# Altium PCB ATSAM4C-CB.PcbDoc (part 2 of 2)
Units mil, origin at the board's own origin, x right, y up, seen from the top; angles counter-clockwise.
Board outline 3937.01 x 5511.81 mil, 2 copper layers (Top Layer, Bottom Layer); 213 components, 172 nets, 705 pads, 473 vias.
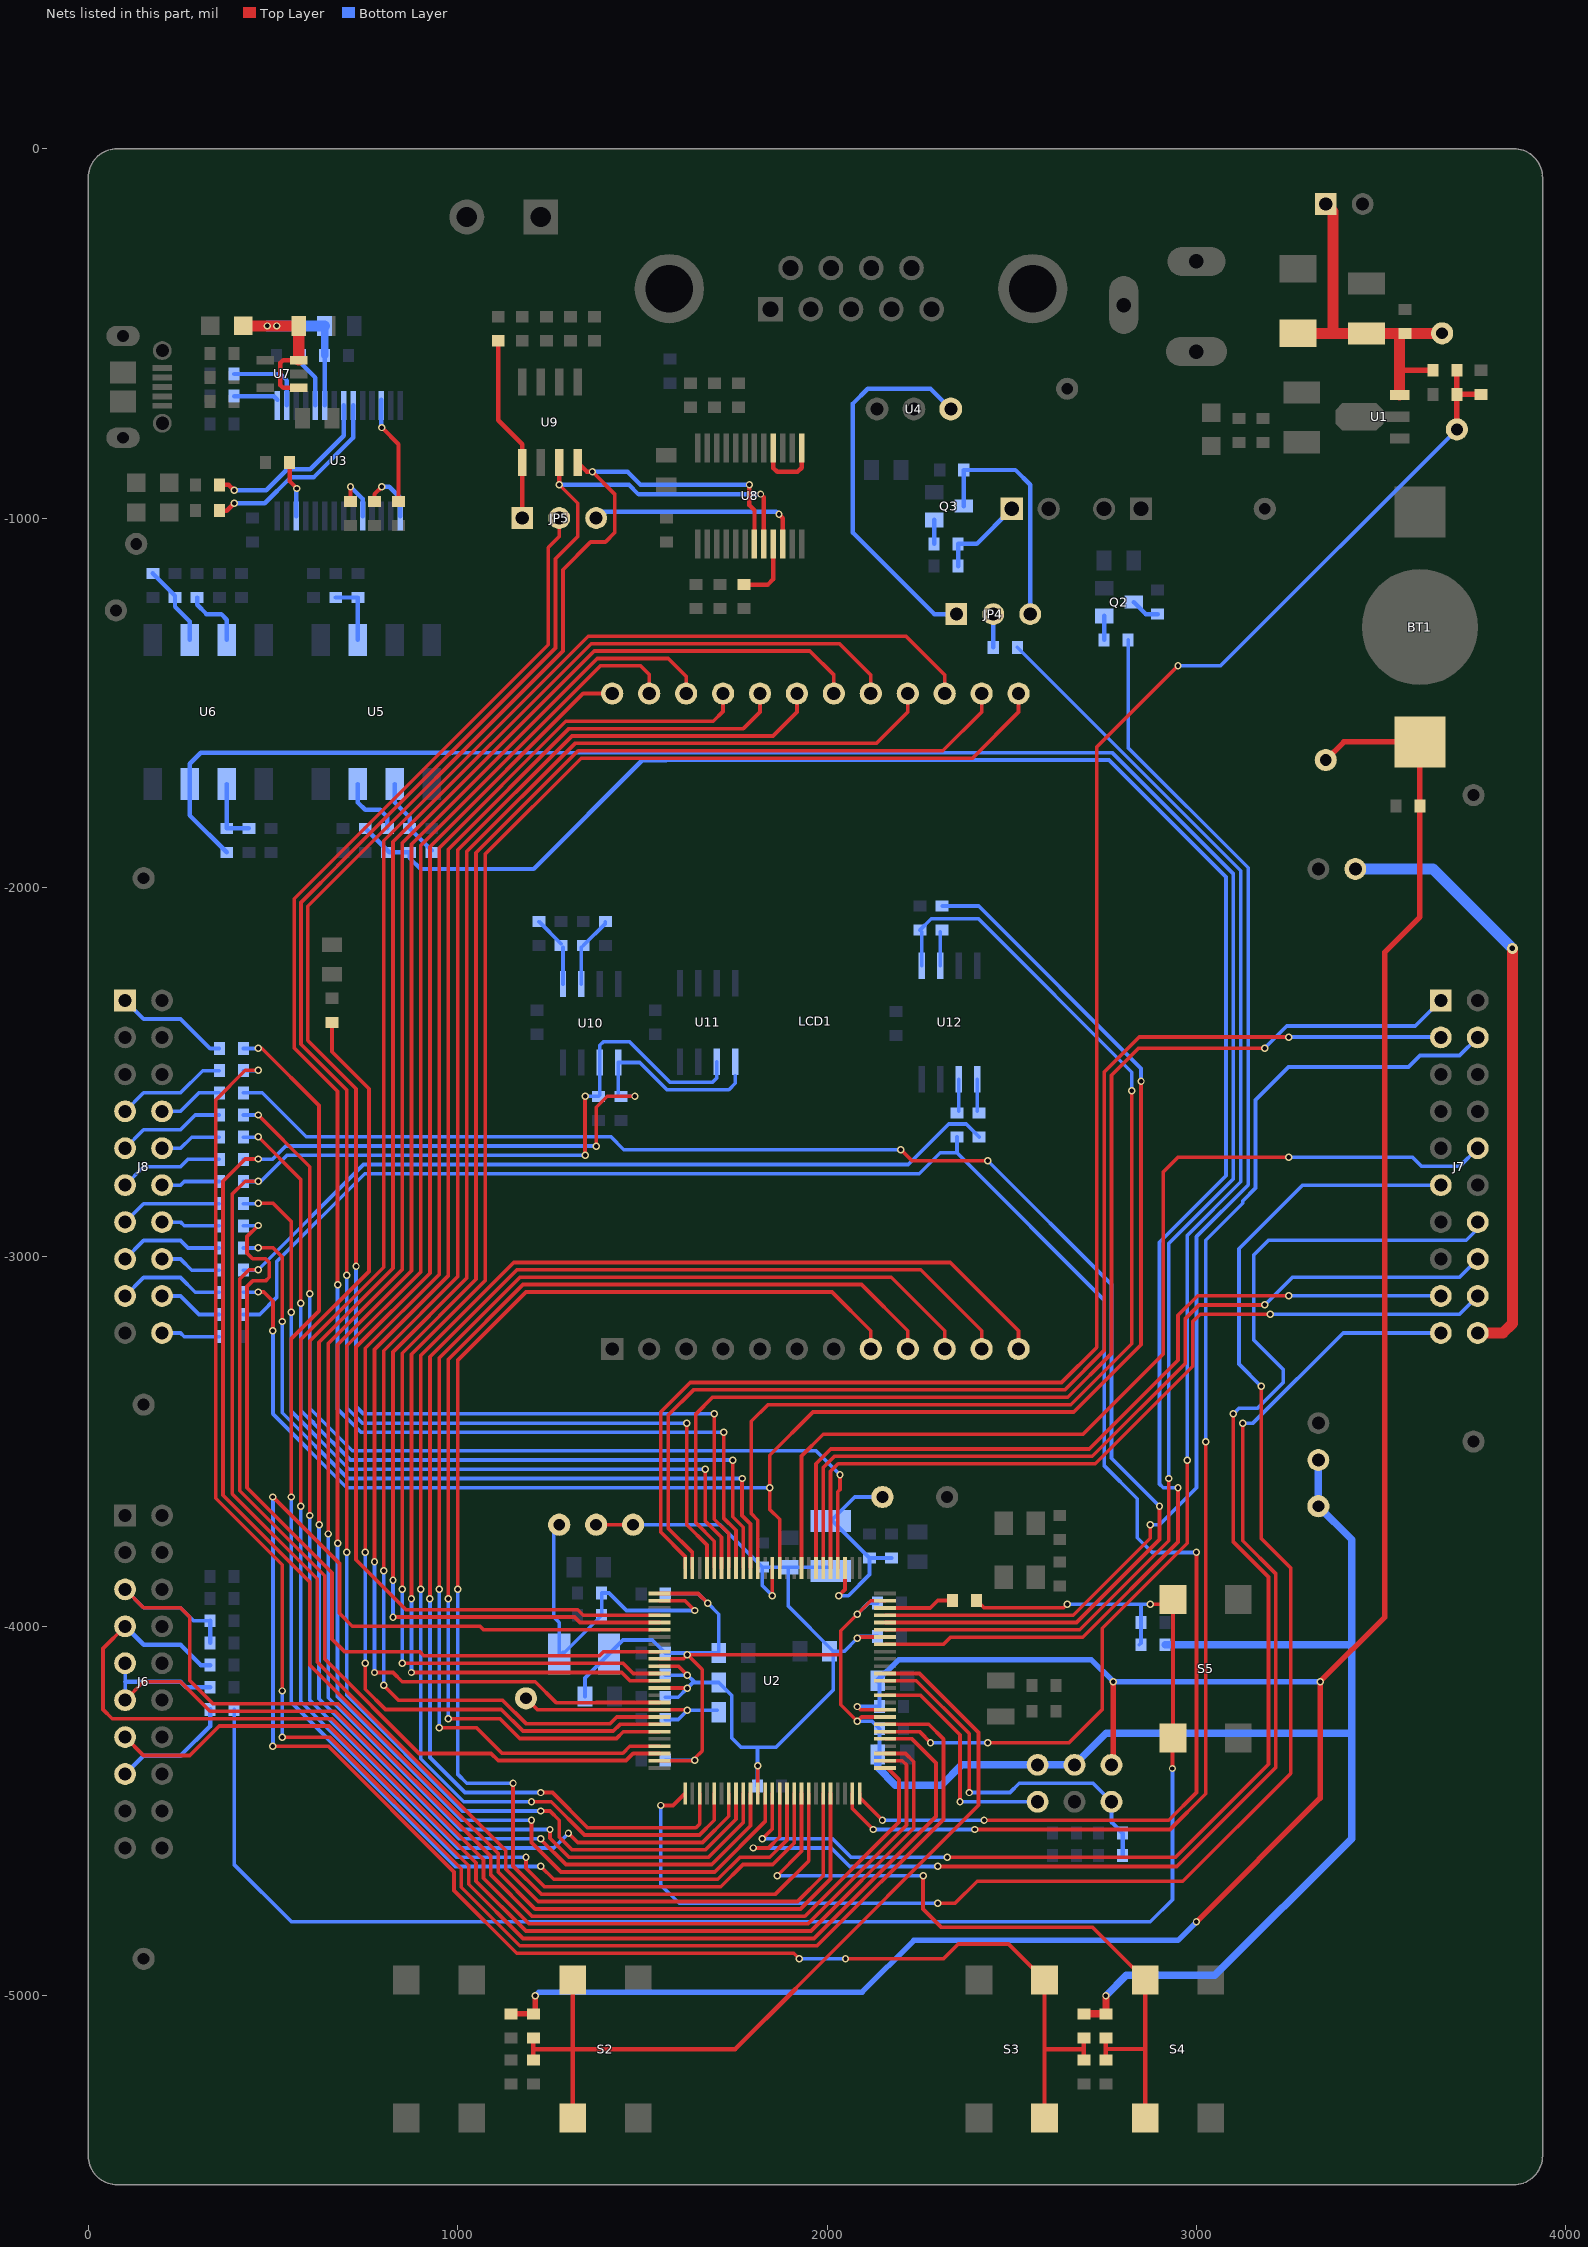
[diagram p2: the nets of this part, all layers, seen from the top]

## Via types
v1: diameter 20, hole 12, Top Layer to Bottom Layer, 470 vias
v2: diameter 30, hole 15, Top Layer to Bottom Layer, 3 vias

## Nets (pads, with @x,y where several pads share a name; then routed paths per layer and width w, separated by ;. In a path a pad name is that pad's centre, name@x,y a point inside that pad or via, vN(x,y) a via of type N, cw(c..) or ccw(c..) an arc to the next point about the centre after c; other vN are vias at no path point) (continued)
NetJ6_15: J6.15 R79.1 | length 328.8
  Bottom Layer w12: J6.15@100,-4400 150,-4350 250,-4350 330,-4270 R79.1@330,-4225
NetJ8_1: J8.1 R62.2 | length 308.8
  Bottom Layer w10: J8.1@100,-2305.91 150,-2355.91 250,-2355.91 330,-2435.91 R62.2@355,-2435.91
NetJ8_7: J8.7 R63.2 | length 300.6
  Bottom Layer w10: J8.7@100,-2605.91 150,-2555.91 250,-2555.91 310,-2495.91 R63.2@355,-2495.91
NetJ8_8: J8.8 R64.1 | length 175.7
  Bottom Layer w10: J8.8@200,-2605.91 250,-2605.91 300,-2555.91 R64.1@355,-2555.91
NetJ8_9: J8.9 R65.2 | length 292.3
  Bottom Layer w10: J8.9@100,-2705.91 150,-2655.91 250,-2655.91 290,-2615.91 R65.2@355,-2615.91
NetJ8_10: J8.10 R66.1 | length 167.4
  Bottom Layer w10: J8.10@200,-2705.91 250,-2705.91 280,-2675.91 R66.1@355,-2675.91
NetJ8_11: J8.11 R67.2 | length 284
  Bottom Layer w10: J8.11@100,-2805.91 150,-2755.91 250,-2755.91 270,-2735.91 R67.2@355,-2735.91
NetJ8_12: J8.12 R68.1 | length 159.1
  Bottom Layer w10: J8.12@200,-2805.91 250,-2805.91 260,-2795.91 R68.1@355,-2795.91
NetJ8_13: J8.13 R69.2 | length 275.7
  Bottom Layer w10: J8.13@100,-2905.91 150,-2855.91 R69.2@355,-2855.91
NetJ8_14: J8.14 R70.1 | length 159.1
  Bottom Layer w10: J8.14@200,-2905.91 250,-2905.91 260,-2915.91 R70.1@355,-2915.91
NetJ8_15: J8.15 R71.2 | length 284
  Bottom Layer w10: J8.15@100,-3005.91 150,-2955.91 250,-2955.91 270,-2975.91 R71.2@355,-2975.91
NetJ8_16: J8.16 R72.1 | length 167.4
  Bottom Layer w10: J8.16@200,-3005.91 250,-3005.91 280,-3035.91 R72.1@355,-3035.91
NetJ8_17: J8.17 R73.2 | length 292.3
  Bottom Layer w10: J8.17@100,-3105.91 150,-3055.91 250,-3055.91 290,-3095.91 R73.2@355,-3095.91
NetJ8_18: J8.18 R74.1 | length 175.7
  Bottom Layer w10: J8.18@200,-3105.91 250,-3105.91 300,-3155.91 R74.1@355,-3155.91
NetJ8_20: J8.20 R75.1 | length 159.1
  Bottom Layer w10: J8.20@200,-3205.91 250,-3205.91 260,-3215.91 R75.1@355,-3215.91
NetJP1_2: JP1.2 U2.36 | length 638.3
  Top Layer w10: U2.36@2157.33,-4186.61 2252.83,-4186.61 2360,-4293.78 v1(2360,-4475)
  Bottom Layer w10: v1(2360,-4475) JP1.2@2570,-4475
NetJP4_1: JP4.1 U4.1 | length 1025.5
  Bottom Layer w12: U4.1@2335,-705 2280,-650 2110,-650 2070,-690 2070,-1040 2290,-1260 JP4.1@2350,-1260
NetJP4_2: JP4.2 R19.2 | length 90
  Bottom Layer w12: R19.2@2450,-1350 JP4.2@2450,-1260
NetJP4_3: JP4.3 Q3.3 R16.1 | length 644.1
  Bottom Layer w12: Q3.3@2370,-967.5 R16.1@2370,-870 2510,-870 2550,-910 JP4.3@2550,-1260
NetQ1_1: Q1.1 R20.2 R23.2 | length 244.4
  Bottom Layer w12: R23.2@2355,-1130 R20.2@2355,-1070 2405,-1070 Q1.1@2500,-975
NetQ2_1: Q2.1 R18.2 | length 65
  Bottom Layer w12: R18.2@2750,-1330 Q2.1@2750,-1265
NetQ2_3: Q2.3 R25.2 | length 78.5
  Bottom Layer w12: Q2.3@2830,-1227.5 2862.5,-1260 R25.2@2895,-1260
NetQ3_1: Q3.1 R20.1 | length 65
  Bottom Layer w12: R20.1@2290,-1070 Q3.1@2290,-1005
NetR3_1: R3.1 U2.48 | length 191.1
  Top Layer w10: U2.48@2157.32,-3950.39 2279.61,-3950.39 2300,-3930 R3.1@2340,-3930
NetR13_1: R13.1 U3.1 | length 160.7
  Top Layer w12: R13.1@775,-955 775,-935 v1(795,-915)
  Bottom Layer w12: v1(795,-915) 815,-915 845,-945 U3.1@845,-995
NetR14_1: R14.1 U3.5 | length 133.5
  Top Layer w12: R14.1@710,-955 v1(710,-915)
  Bottom Layer w12: v1(710,-915) 742.64,-947.64 U3.5@742.64,-995
NetR15_2: R15.2 U3.16 | length 217.4
  Bottom Layer w12: R15.2@395,-610 520,-610 537.91,-627.91 U3.16@537.91,-695
NetR17_2: R17.2 U3.15 | length 121.5
  Bottom Layer w12: R17.2@395,-670 502.28,-670 U3.15@512.32,-680.04
NetR21_1: R21.1 U3.23 | length 531.6
  Top Layer w12: R21.1@355,-980 375,-980 v1(395,-960)
  Bottom Layer w12: v1(395,-960) 477.85,-960 547.85,-890 610,-890 717.05,-782.95 U3.23@717.05,-695
NetR22_2: R22.2 U3.19 | length 151.4
  Bottom Layer w12: R22.2@575,-560 575,-580 614.68,-619.69 U3.19@614.68,-695
NetR26_1: R26.1 U3.22 | length 486.2
  Top Layer w12: R26.1@355,-910 380,-910 v1(395,-925)
  Bottom Layer w12: v1(395,-925) 481.73,-925 538.73,-868 600.89,-868 691.46,-777.43 U3.22@691.46,-695
NetR27_1: R27.1 U3.12 | length 153.9
  Top Layer w12: R27.1@545,-850 545,-900 v1(565,-920)
  Bottom Layer w12: U3.12@563.5,-995 563.5,-921.5 v1(565,-920)
NetR28_1: R28.1 U3.26 | length 294.1
  Top Layer w12: v1(795,-755) 840,-800 R28.1@840,-955
  Bottom Layer w12: U3.26@793.82,-680.04 793.82,-753.82 v1(795,-755)
NetR29_1: R29.1 R35.2 U5.2 | length 175
  Bottom Layer w12: R29.1@670,-1215 R35.2@730,-1215 U5.2@730,-1330
NetR31_1: R31.1 R36.2 U6.2 | length 180
  Bottom Layer w12: U6.2@375,-1720 R36.2@375,-1840 R31.1@435,-1840
NetR33_2: R33.2 U5.7 | length 176.6
  Bottom Layer w12: U5.7@730,-1720 730,-1770 750,-1790 790,-1790 810,-1810 R33.2@810,-1840
NetR34_2: R34.2 U6.7 | length 171.6
  Bottom Layer w12: R34.2@295,-1215 295,-1235 320,-1260 360,-1260 375,-1275 U6.7@375,-1330
NetR37_2: R37.2 R39.2 U5.6 | length 221.4
  Bottom Layer w12: U5.6@830,-1720 830,-1770 870,-1810 R37.2@870,-1840 R39.2@930,-1900
NetR38_2: R38.2 R40.2 U6.6 | length 216.4
  Bottom Layer w12: R40.2@175,-1150 R38.2@235,-1210 ; R38.2@235,-1215 235,-1240 275,-1280 U6.6@275,-1330
NetR45_1: R45.1 U8.9 | length 176.1
  Top Layer w12: R45.1@1780,-1180 1840,-1180 1854.72,-1165.28 U8.9@1854.72,-1070
NetR48_1: R48.1 R50.2 U10.1 | length 183.6
  Bottom Layer w10: R50.2@1220,-2092.44 R48.1@1280,-2152.44 ; U10.1@1285,-2261.14 R48.1@1285,-2162.44
NetR49_1: R49.1 R51.2 U10.2 | length 188.6
  Bottom Layer w10: U10.2@1335,-2261.14 R49.1@1335,-2162.44 ; R49.1@1340,-2157.44 1400,-2097.44 R51.2@1400,-2092.44
NetR55_2: R55.2 U12.5 | length 86.5
  Bottom Layer w10: R55.2@2406.69,-2605.43 U12.5@2406.69,-2518.97
NetR56_2: R56.2 U12.2 | length 91.5
  Bottom Layer w10: U12.2@2306.69,-2211.89 R56.2@2306.69,-2120.43
NetR57_2: R57.2 U12.6 | length 86.5
  Bottom Layer w10: R57.2@2356.69,-2605.43 U12.6@2356.69,-2518.97
NetU8_13: U8.13 U8.16 | length 193.7
  Top Layer w12: U8.16@1854.72,-810.16 1854.72,-864.72 1865,-875 1920,-875 1931.5,-863.5 U8.13@1931.5,-810.16
NRST: C69.2 R3.2 R78.1 R79.2 S5.2 | length 4503.6
  Top Layer w10: R3.2@2405,-3930 2425,-3950 2640,-3950 v1(2650,-3940) ; v1(2875,-3940) S5.2@2924.41,-3940 ; v1(2935,-4385) S5.2@2935,-4303.43 ; S5.2@2936.42,-4302.01 S5.2@2936.42,-3927.99
  Bottom Layer w10: R79.2@395,-4225 395,-4645 550,-4800 2875,-4800 2935,-4740 v1(2935,-4385) ; v1(2650,-3940) 2850,-3940 ; R78.1@2845,-4050 2850,-4045 C69.2@2850,-3990 2850,-3940 ; v1(2875,-3940) 2850,-3940
PA6: R56.1 R73.1 U2.62 | length 4735.8
  Top Layer w10: v1(460,-3095) 475,-3095 500,-3120 v1(500,-3200) ; U2.62@1871.7,-3841.92 1871.7,-3710.32 1845,-3683.62 v1(1845,-3625) 1845,-3536.72 1961.72,-3420 2668.14,-3420 2850,-3238.14 v1(2850,-2525)
  Bottom Layer w10: R73.1@420,-3095.91 v1@459.09,-3095.91 ; v1(500,-3200) 500,-3425 700,-3625 v1(1845,-3625) ; R56.1@2311.69,-2050.43 2410.43,-2050.43 2850,-2490 v1(2850,-2525)
PA7: R55.1 R72.2 U2.98 | length 4381.3
  Top Layer w10: v1(460,-3035) 435,-3035 410,-3060 410,-3633.28 640,-3863.28 640,-4088.49 895.6,-4344.1 1090.63,-4344.1 1110,-4363.47 1455.95,-4363.47 1475,-4344.41 ; 1475,-4344.1 U2.98@1546.69,-4344.1
  Bottom Layer w10: R72.2@420,-3035.91 v1@459.09,-3035.91 ; v1(460,-3035) 745,-2750 2220,-2750 2329.57,-2640.43 2376.69,-2640.43 R55.1@2411.69,-2675.43
PA8: R57.1 R74.2 U2.25 | length 5262.1
  Top Layer w10: U2.25@2088.23,-4452.56 2088.23,-4463.23 v1(2150,-4525) ; v1(2425,-4525) 2925,-4525 3000,-4450 v1(3000,-3800)
  Bottom Layer w10: R74.2@420,-3155.91 464.09,-3155.91 510,-3110 510,-3013.28 748.28,-2775 2249.64,-2775 2306.34,-2718.31 2351.69,-2718.31 ; v1(2150,-4525) v1(2425,-4525) ; R57.1@2351.69,-2675.43 2351.69,-2718.31 ; v1(3000,-3800) 2880,-3800 2840,-3760 2840,-3655 2750,-3565 2750,-3116.61 2351.69,-2718.31
PA9: JP5.2 U2.68 | length 4209.1
  Top Layer w10: v1(675,-3075) 675,-2551.57 558,-2434.57 558,-2030.28 1245,-1343.28 1245,-1080 1275,-1050 JP5.2@1275,-1000 ; v1(1720,-3475) 1720,-3706.72 1753.58,-3740.29 U2.68@1753.58,-3841.93
  Bottom Layer w10: v1(675,-3075) 675,-3411.57 738.43,-3475 v1(1720,-3475)
PA10: U2.69 U8.7 U9.4 | length 5043.5
  Top Layer w10: v1(725,-3025) 725,-2545 594,-2414 594,-2051 1285,-1360 1285,-1140 1360,-1065 1400,-1065 1425,-1040 1425,-935 v1(1365,-875) ; v1(1695,-3425) 1695,-3710 1733.9,-3748.9 U2.69@1733.9,-3841.92
  Top Layer w12: U9.4@1325,-850 1350,-875 v1(1365,-875) ; v1(1790,-910) 1790,-965 1803.54,-978.54 U8.7@1803.54,-1070
  Bottom Layer w10: v1(725,-3025) 725,-3405 745,-3425 v1(1695,-3425)
  Bottom Layer w12: v1(1365,-875) 1460,-875 1495,-910 v1(1790,-910)
PA11: R69.1 U2.70 | length 2133.3
  Top Layer w10: v1(460,-2855) 500,-2855 550,-2905 v1(550,-3150) ; v1(1670,-3575) 1670,-3715 1714.21,-3759.21 U2.70@1714.21,-3841.93
  Bottom Layer w10: R69.1@420,-2855.91 v1@459.09,-2855.91 ; v1(550,-3150) 550,-3418.43 706.57,-3575 v1(1670,-3575)
PA12: R70.2 U2.84 | length 2267.5
  Top Layer w10: v1(460,-2915) 430,-2945 430,-2990 445,-3005 480,-3005 490,-3015 490,-3055 480,-3065 445,-3065 430,-3080 430,-3625 660,-3855 660,-4035 693.5,-4068.5 896.79,-4068.5 908.28,-4080 1383.81,-4080 1395,-4068.81 ; 1395,-4068.5 U2.84@1546.69,-4068.5
  Bottom Layer w10: R70.2@420,-2915.91 v1@459.09,-2915.91
PA13: J7.1 U2.71 | length 3358.9
  Top Layer w10: U2.71@1694.53,-3841.92 1694.53,-3769.53 1645,-3720 1645,-3425 1690,-3380 2651.57,-3380 2770,-3261.57 2770,-2508.28 2843.28,-2435 v1(3185,-2435)
  Bottom Layer w10: v1(3185,-2435) 3185,-2434.64 3244.64,-2375 3592.32,-2375 J7.1@3661.42,-2305.91
PA14: U2.72 U8.8 U9.3 | length 5022.3
  Top Layer w10: 661.64,-1954.93 686.57,-1930 ; v1(700,-3050) 700,-2548.28 576,-2424.28 576,-2040.72 686.57,-1930.15 686.57,-1930 ; v1(1275,-910) 1325,-960 1325,-1050 1265,-1110 1265,-1351.57 686.57,-1930 ; v1(1620,-3450) 1620,-3725 1674.84,-3779.84 U2.72@1674.84,-3841.93
  Top Layer w12: v1(1275,-910) U9.3@1275,-850 ; v1(1820,-935) 1829.13,-944.13 U8.8@1829.13,-1070
  Bottom Layer w10: v1(700,-3050) 700,-3408.28 741.72,-3450 v1(1620,-3450)
  Bottom Layer w12: v1(1275,-910) 1463.89,-910 1489.89,-936 v1@1820,-936
PA16: J7.3 U2.74 | length 3397.7
  Top Layer w10: U2.74@1635.47,-3841.93 1635.47,-3800.47 1570,-3735 1570,-3428.28 1638.28,-3360 2643.28,-3360 2750,-3253.28 2750,-2500 2845,-2405 v1(3250,-2405)
  Bottom Layer w10: v1(3250,-2405) 3660.51,-2405 J7.3@3661.42,-2405.91
PA17: C68.2 R2.1 R4.2 TP4.1 U2.75 | length 4877.9
  Top Layer w10: U2.75@1615.79,-3841.93 1615.79,-3810.79 1550,-3745 1550,-3420 1630,-3340 2635,-3340 2730,-3245 2730,-1620 v1(2950,-1400)
  Top Layer w15: TP4.1@3705,-760 R4.2@3705,-665 C68.2@3770,-665 ; R4.2@3705,-660 R2.1@3705,-600
  Bottom Layer w10: v1(2950,-1400) 3065,-1400 TP4.1@3705,-760
PA18: J7.4 U2.24 | length 3666.5
  Top Layer w10: U2.24@2068.55,-4452.56 2068.55,-4493.55 v1(2125,-4550) ; v1(2400,-4550) 2928.28,-4550 3025,-4453.28 v1(3025,-3500)
  Bottom Layer w10: v1(2125,-4550) v1(2400,-4550) ; v1(3025,-3500) 3025,-2955 3125,-2855 3125,-2848.43 3160,-2813.43 3160,-2575.15 3249.24,-2485.91 3574.09,-2485.91 3605,-2455 3712.32,-2455 J7.4@3761.42,-2405.91
PA21: R54.1 U2.65 U12.1 | length 3105.4
  Top Layer w10: U2.65@1812.64,-3841.92 1812.64,-3712.64 1795,-3695 1795,-3445 1840,-3400 2659.85,-3400 2825,-3234.85 v1(2825,-2550)
  Bottom Layer w10: R54.1@2251.69,-2115.43 2282.13,-2085 2410,-2085 2825,-2500 v1(2825,-2550) ; U12.1@2256.69,-2211.89 R54.1@2256.69,-2120.43
PA22: R71.1 U2.66 | length 2106.4
  Top Layer w10: v1(460,-2975) 500,-2975 525,-3000 v1(525,-3175) ; v1(1770,-3600) 1770,-3700.15 1792.95,-3723.1 U2.66@1792.95,-3841.92
  Bottom Layer w10: R71.1@420,-2975.91 v1@459.09,-2975.91 ; v1(525,-3175) 525,-3421.72 703.28,-3600 v1(1770,-3600)
PA23: R66.2 U2.67 | length 2372
  Top Layer w10: v1(460,-2675) 575,-2790 v1(575,-3125) ; v1(1745,-3550) 1745,-3703.43 1773.27,-3731.7 U2.67@1773.27,-3841.92
  Bottom Layer w10: R66.2@420,-2675.91 v1@460,-2675.91 ; v1(575,-3125) 575,-3415.15 610,-3450.15 ; 600.93,-3439.22 610,-3448.28 610,-3450.15 ; v1(1745,-3550) 709.85,-3550 610,-3450.15
PA24: R46.1 R67.1 U2.21 U10.5 U11.5 | length 5194
  Top Layer w10: v1(460,-2735) 425,-2735 365,-2795 365,-3645 600,-3880 600,-4105.06 1110,-4615.06 1110,-4665.21 1209.79,-4765 1928.28,-4765 2009.49,-4683.8 U2.21@2009.49,-4452.56 ; v1(1375,-2700) 1375,-2595 1405,-2565 v1(1480,-2565)
  Bottom Layer w10: R67.1@420,-2735.91 499.09,-2735.91 535,-2700 v1(1375,-2700) ; R46.1@1435,-2558.74 U10.5@1435,-2473.74 1493.02,-2473.74 1566.72,-2547.44 1734.25,-2547.44 1751.69,-2530 1751.69,-2510 ; R46.1@1441.69,-2565.43 v1@1479.57,-2565.43
PA25: R47.1 R68.2 U2.20 U10.6 U11.6 | length 5066.3
  Top Layer w10: v1(460,-2795) 425,-2795 390,-2830 390,-3641.57 620,-3871.57 620,-4096.78 1130,-4606.78 1130,-4656.92 1218.08,-4745 1920,-4745 1989.81,-4675.19 U2.20@1989.81,-4452.56 ; v1(1345,-2725) v1(1345,-2565)
  Bottom Layer w10: R68.2@420,-2795.91 467.38,-2795.91 538.28,-2725 v1(1345,-2725) ; v1(1345,-2565) R47.1@1381.26,-2565 ; R47.1@1385,-2562.13 U10.6@1385,-2473.74 1385,-2427.44 1395,-2417.44 1465,-2417.44 1575,-2527.44 1690,-2527.44 1701.69,-2515.75 U11.6@1701.69,-2471.73
PA29: J7.10 U2.59 | length 2788
  Top Layer w10: U2.59@1930.75,-3841.92 1930.75,-3539.25 1990,-3480 2692.99,-3480 2910,-3262.99 2910,-2770 2950,-2730 v1(3250,-2730)
  Bottom Layer w10: v1(3250,-2730) 3585,-2730 3610,-2755 3712.32,-2755 J7.10@3761.42,-2705.91
PB0: J6.5 R59.1 R76.2 U2.26 | length 3188.1
  Top Layer w10: J6.5@100,-3900 150,-3950 250,-3950 275,-3975 275,-4146.72 338.28,-4210 676.66,-4210 1090,-4623.34 1090,-4673.49 1201.51,-4785 1940,-4785 2195,-4530 2195,-4415 2163.47,-4383.47 U2.26@2157.32,-4383.47
  Bottom Layer w10: J6.5@100,-3900 150,-3950 250,-3950 285,-3985 R59.1@330,-3985
  Bottom Layer w12: R76.2@330,-4045 R59.1@330,-3985
PB1: J6.13 U2.30 | length 2962.7
  Top Layer w10: J6.13@100,-4300 150,-4350 275,-4350 355,-4270 651.8,-4270 1030,-4648.2 1030,-4698.34 1176.66,-4845 1964.85,-4845 2295,-4514.85 2295,-4369.83 2230.21,-4305.04 ; U2.30@2157.33,-4304.72 2230.21,-4304.72
PB2: J6.7 R60.1 U2.28 | length 3378.3
  Top Layer w10: J6.7@100,-4000 40,-4060 40,-4225 65,-4250 660.09,-4250 1050,-4639.91 1050,-4690.06 1184.94,-4825 1956.57,-4825 2235,-4546.57 2235,-4366.72 2212.7,-4344.41 ; U2.28@2157.32,-4344.1 2212.7,-4344.1
  Bottom Layer w12: J6.7@100,-4000 150,-4050 250,-4050 305,-4105 R60.1@330,-4105
PB3: J6.9 J6.11 R61.1 U2.27 | length 3108.7
  Top Layer w10: J6.11@100,-4200 150,-4150 250,-4150 330,-4230 668.37,-4230 1070,-4631.63 1070,-4681.78 1193.22,-4805 1948.28,-4805 2215,-4538.28 2215,-4375 2203.78,-4363.78 U2.27@2157.32,-4363.78
  Bottom Layer w10: J6.11@100,-4200 100,-4150 J6.9@100,-4100
  Bottom Layer w12: 100,-4150 250,-4150 265,-4165 R61.1@330,-4165
PB4: R30.1 R33.1 R37.1 U2.43 | length 5463.6
  Top Layer w10: U2.43@2157.32,-4048.81 2315,-4048.81 2334.37,-4029.44 2692.27,-4029.44 2950,-3771.72 v1(2950,-3625)
  Bottom Layer w10: 1565,-1655 2763.43,-1655 3080,-1971.57 3080,-2780.29 2900,-2960.29 2900,-3615 2910,-3625 v1(2950,-3625)
  Bottom Layer w12: R30.1@750,-1840 815,-1905 R37.1@870,-1905 870,-1920 900,-1950 1206,-1950 1500,-1656 1565,-1656
PB5: R36.1 U2.45 U6.3 | length 6000
  Top Layer w10: U2.45@2157.32,-4009.44 2683.99,-4009.44 2925,-3768.43 v1(2925,-3600)
  Bottom Layer w10: 985,-1635 2771.72,-1635 3100,-1963.28 3100,-2788.58 2925,-2963.58 v1(2925,-3600)
  Bottom Layer w12: R36.1@375,-1905 275,-1805 U6.3@275,-1720 275,-1665 305,-1635 985,-1635
PB6: J7.11 U2.1 | length 4261.1
  Top Layer w10: v1(1550,-4485) 1583.03,-4485 U2.1@1615.47,-4452.56 ; v1(2300,-4750) 2346.72,-4750 2406.72,-4690 2963.14,-4690 3255,-4398.14 3255,-3841.86 3175,-3761.86 v1(3175,-3350)
  Bottom Layer w10: v1(1550,-4485) 1550,-4700 1600,-4750 v1(2300,-4750) ; v1(3175,-3350) 3115,-3290 3115,-2978.14 3287.23,-2805.91 J7.11@3661.42,-2805.91
PB9: J7.14 U2.13 | length 3818.4
  Top Layer w10: v1(1825,-4575) 1852.01,-4547.99 U2.13@1852.01,-4452.56 ; v1(2325,-4625) 2943.28,-4625 3195,-4373.28 3195,-3866.72 3100,-3771.72 v1(3100,-3425)
  Bottom Layer w10: v1(1825,-4575) 2014.64,-4575 2064.64,-4625 v1(2325,-4625) ; v1(3100,-3425) 3115,-3410 3165,-3410 3235,-3340 3235,-3305 3155,-3225 3155,-2994.71 3194.71,-2955 3730,-2955 3761.42,-2923.58 J7.14@3761.42,-2905.91
PB10: J7.19 U2.14 | length 3354.6
  Top Layer w10: v1(1800,-4600) 1841.38,-4600 1871.7,-4569.68 U2.14@1871.7,-4452.56 ; v1(2300,-4650) 2946.57,-4650 3215,-4381.57 3215,-3858.43 3125,-3768.43 v1(3125,-3450)
  Bottom Layer w10: v1(1800,-4600) 2011.36,-4600 2061.36,-4650 v1(2300,-4650) ; v1(3125,-3450) 3153.28,-3450 3397.38,-3205.91 J7.19@3661.42,-3205.91
PB11: R62.1 U2.15 | length 3626.5
  Top Layer w10: v1(460,-2435) 470,-2435 625,-2590 625,-3146.18 550,-3221.18 v1(550,-3650) ; v1(1225,-4650) 1260,-4685 1704.23,-4685 1764.23,-4625 1844.66,-4625 1891.38,-4578.28 U2.15@1891.38,-4452.56
  Bottom Layer w10: R62.1@420,-2435.91 459.09,-2435.91 v1(460,-2435) ; v1(550,-3650) 550,-4206.27 993.73,-4650 v1(1225,-4650)
PB12: R52.1 U2.16 | length 3701.1
  Top Layer w10: v1(575,-3675) 575,-3224.46 760,-3039.46 760,-2545 660,-2445 R52.1@660,-2365 ; v1(1185,-4625) 1185,-4655 1234.64,-4704.64 1234.64,-4705 1712.52,-4705 1772.52,-4645 1852.95,-4645 1911.07,-4586.88 U2.16@1911.07,-4452.56
  Bottom Layer w10: v1(575,-3675) 575,-4202.99 997.01,-4625 v1(1185,-4625)
PB13: C23.2 R8.1 S3.2 U2.81 | length 4903
  Top Layer w10: v1(500,-4325) 650.23,-4325 990,-4664.77 990,-4715 1160,-4885 1910,-4885 v1(1925,-4900) ; v1(500,-3650) 680,-3830 680,-3965 715,-4000 1060.86,-4000 1070,-4009.14 ; 1070,-4009.44 U2.81@1546.69,-4009.44 ; v1(2050,-4900) 2315,-4900 2355,-4860 2491.3,-4860 S3.2@2588.58,-4957.28
  Top Layer w12: S3.2@2588.58,-5331.3 2588.58,-5145 ; S3.2@2588.58,-4957.28 2588.58,-5145 ; C23.2@2695,-5174.29 2695,-5145 ; R8.1@2695,-5114.29 2695,-5145 ; 2588.58,-5145 2695,-5145
  Bottom Layer w10: v1(500,-4325) v1(500,-3650) ; v1(1925,-4900) v1(2050,-4900)
PB14: C24.2 R9.1 S4.2 U2.17 | length 1956.2
  Top Layer w10: v1(1865,-4675) 1930.75,-4609.25 U2.17@1930.75,-4452.56 ; v1(2260,-4675) 2260,-4765 2310,-4815 2719.13,-4815 S4.2@2861.42,-4957.28
  Top Layer w12: C24.2@2755,-5174.29 2755,-5144.29 ; R9.1@2755,-5114.29 2755,-5144.29 ; S4.2@2861.42,-5331.3 2861.42,-5144.29 ; S4.2@2861.42,-4957.28 2861.42,-5144.29 ; 2755,-5144.29 2861.42,-5144.29
  Bottom Layer w10: v1(1865,-4675) v1(2260,-4675)
PB15: LCD1.8 U2.18 | length 3843.6
  Top Layer w10: v1(1000,-3900) 1000,-3280.29 1185.29,-3095 2013.5,-3095 2118.5,-3200 LCD1.8@2118.5,-3249.41 ; v1(1150,-4425) 1150,-4648.64 1226.36,-4725 1860.44,-4725 1950.44,-4635 U2.18@1950.44,-4452.56
  Bottom Layer w10: v1(1000,-3900) 1000,-4400 1025,-4425 v1(1150,-4425)
PB16: LCD1.9 U2.95 | length 3002.7
  Top Layer w10: v1(975,-4250) 1115,-4250 1168.47,-4303.47 1430.15,-4303.47 1448.26,-4285.35 ; v1(975,-3925) 975,-3277.01 1177.01,-3075 2093.5,-3075 2218.5,-3200 LCD1.9@2218.5,-3249.41 ; 1448.26,-4285.04 U2.95@1546.69,-4285.04
  Bottom Layer w10: v1(975,-4250) v1(975,-3925)
PB17: LCD1.10 U2.97 | length 3202.7
  Top Layer w10: v1(950,-4275) 1051.53,-4275 1120,-4343.47 1447.35,-4343.47 1466.09,-4324.72 ; v1(950,-3900) 950,-3273.73 1168.73,-3055 2173.5,-3055 2318.5,-3200 LCD1.10@2318.5,-3249.41 ; 1466.09,-4324.41 U2.97@1546.69,-4324.41
  Bottom Layer w10: v1(950,-4275) v1(950,-3900)
PB18: LCD1.11 U2.3 | length 3744.1
  Top Layer w10: v1(925,-3925) 925,-3270.44 1160.44,-3035 2253.5,-3035 2418.5,-3200 LCD1.11@2418.5,-3249.41 ; v1(1225,-4450) 1256.57,-4450 1351.57,-4545 1645,-4545 1655.16,-4534.84 U2.3@1655.16,-4452.56 ; 1655.47,-4507.97 U2.3@1655.47,-4452.56
  Bottom Layer w10: v1(925,-3925) 925,-4355 1020,-4450 v1(1225,-4450)
PB19: LCD1.12 U2.5 | length 3909.3
  Top Layer w10: v1(900,-3900) 900,-3267.16 1152.16,-3015 2333.5,-3015 2518.5,-3200 LCD1.12@2518.5,-3249.41 ; v1(1200,-4475) 1253.28,-4475 1343.28,-4565 1654.53,-4565 1694.53,-4525 U2.5@1694.53,-4452.56
  Bottom Layer w10: v1(900,-3900) 900,-4358.28 1016.72,-4475 v1(1200,-4475)
PB20: LCD1.13 U2.88 | length 4632.2
  Top Layer w10: v1(875,-4125) 1444.16,-4125 1466.72,-4147.56 1475,-4147.56 ; v1(875,-3925) 875,-3263.87 1075,-3063.87 1075,-1909.41 1334.41,-1650 2393.5,-1650 2518.5,-1525 LCD1.13@2518.5,-1475 ; 1475,-4147.24 U2.88@1546.69,-4147.24
  Bottom Layer w10: v1(875,-4125) v1(875,-3925)
PB21: LCD1.14 U2.87 | length 4561.1
  Top Layer w10: v1(850,-4100) 1447.76,-4100 1475,-4127.24 ; v1(850,-3900) 850,-3260.59 1050,-3060.59 1050,-1906.13 1326.13,-1630 2313.5,-1630 2418.5,-1525 LCD1.14@2418.5,-1475 ; 1475,-4127.56 U2.87@1546.69,-4127.56
  Bottom Layer w10: v1(850,-4100) v1(850,-3900)
PB22: LCD1.15 U2.7 | length 5667.9
  Top Layer w10: v1(600,-3700) 600,-3227.75 800,-3027.75 800,-1873.28 1353.28,-1320 2213.5,-1320 2318.5,-1425 LCD1.15@2318.5,-1475 ; v1(1300,-4560) 1325,-4585 1662.81,-4585 1733.9,-4513.91 U2.7@1733.9,-4452.56
  Bottom Layer w10: v1(600,-3700) 600,-4199.71 1000.29,-4600 1260,-4600 v1(1300,-4560)
PB23: LCD1.16 U2.80 | length 4286.5
  Top Layer w10: v1(825,-3975) 1316.64,-3975 1331.41,-3989.77 ; v1(825,-3875) 825,-3257.31 1025,-3057.31 1025,-1902.84 1317.84,-1610 2133.5,-1610 2218.5,-1525 LCD1.16@2218.5,-1475 ; 1335,-3990.07 1331.72,-3990.07 1331.41,-3989.77 ; U2.80@1546.69,-3989.77 1331.41,-3989.77
  Bottom Layer w10: v1(825,-3975) v1(825,-3875)
PB24: LCD1.17 U2.10 | length 5489.3
  Top Layer w10: v1(625,-3725) 625,-3231.03 825,-3031.03 825,-1876.57 1361.57,-1340 2033.5,-1340 2118.5,-1425 LCD1.17@2118.5,-1475 ; v1(1225,-4575) 1225,-4576.92 1293.08,-4645 1687.67,-4645 1792.95,-4539.72 U2.10@1792.95,-4452.56
  Bottom Layer w10: v1(625,-3725) 625,-4196.42 1003.58,-4575 v1(1225,-4575)
PB25: LCD1.18 U2.9 | length 5290.3
  Top Layer w10: v1(650,-3750) 650,-3234.32 850,-3034.32 850,-1879.85 1369.85,-1360 1953.5,-1360 2018.5,-1425 LCD1.18@2018.5,-1475 ; v1(1250,-4550) 1250,-4573.64 1301.36,-4625 1679.38,-4625 1773.27,-4531.11 U2.9@1773.27,-4452.56
  Bottom Layer w10: v1(650,-3750) 650,-4193.14 1006.86,-4550 v1(1250,-4550)
PB26: LCD1.19 U2.93 | length 4264
  Top Layer w10: v1(800,-4160) 840,-4200 1121.57,-4200 1185.03,-4263.47 1412.95,-4263.47 1431.06,-4245.35 1470,-4245.35 ; v1(800,-3850) 800,-3254.02 1000,-3054.02 1000,-1899.56 1309.56,-1590 1853.5,-1590 1918.5,-1525 LCD1.19@1918.5,-1475 ; 1470,-4245.67 U2.93@1546.69,-4245.67
  Bottom Layer w10: v1(800,-4160) v1(800,-3850)
PB27: LCD1.20 U2.91 | length 4164.4
  Top Layer w10: v1(775,-4125) 825,-4125 850,-4150 1210,-4150 1266.61,-4206.61 1375,-4206.61 ; v1(775,-3825) 775,-3250.74 975,-3050.74 975,-1896.27 1301.27,-1570 1773.5,-1570 1818.5,-1525 LCD1.20@1818.5,-1475 ; 1375,-4206.3 U2.91@1546.69,-4206.3
  Bottom Layer w10: v1(775,-4125) v1(775,-3825)
PB28: LCD1.21 U2.94 | length 4181.1
  Top Layer w10: v1(750,-4100) 750,-4170.21 804.79,-4225 1118.28,-4225 1176.75,-4283.47 1421.55,-4283.47 1439.34,-4265.67 ; v1(750,-3800) 750,-3247.45 950,-3047.45 950,-1892.99 1292.99,-1550 1692.01,-1550 1718.5,-1523.5 LCD1.21@1718.5,-1475 ; 1439.34,-4265.35 U2.94@1546.69,-4265.35
  Bottom Layer w10: v1(750,-4100) v1(750,-3800)
PB29: LCD1.22 U2.12 | length 4930.1
  Top Layer w10: v1(675,-3775) 675,-3237.6 875,-3037.6 875,-1883.14 1378.14,-1380 1570,-1380 1618.5,-1428.5 LCD1.22@1618.5,-1475 ; v1(1200,-4525) 1200,-4585.36 1279.64,-4665 1695.95,-4665 1832.32,-4528.63 U2.12@1832.32,-4452.56
  Bottom Layer w10: v1(675,-3775) 675,-4189.85 1010.15,-4525 v1(1200,-4525)
PB30: LCD1.23 U2.8 | length 4621.8
  Top Layer w10: v1(700,-3800) 700,-3240.88 900,-3040.88 900,-1886.42 1386.42,-1400 1495,-1400 1518.5,-1423.5 LCD1.23@1518.5,-1475 ; v1(1225,-4500) 1250,-4500 1275,-4525 1275,-4570.36 1309.64,-4605 1671.1,-4605 1753.58,-4522.52 U2.8@1753.58,-4452.56
  Bottom Layer w10: v1(700,-3800) 700,-4186.57 1013.43,-4500 v1(1225,-4500)
PB31: LCD1.24 U2.79 | length 3562.1
  Top Layer w10: 1340,-3970.07 U2.79@1546.69,-3970.07 ; 1340,-3969.77 1325.23,-3955 860,-3955 725,-3820 725,-3244.17 925,-3044.17 925,-1889.71 1339.71,-1475 LCD1.24@1418.5,-1475
PC0: R18.1 U2.47 | length 3494.8
  Top Layer w10: U2.47@2157.32,-3970.07 2666.79,-3970.07 2875,-3761.86 v1(2875,-3725)
  Bottom Layer w10: R18.1@2815,-1330 2815,-1621.72 3140,-1946.72 3140,-2805.15 3000,-2945.15 3000,-3625 2900,-3725 v1(2875,-3725)
PC1: R19.1 U2.31 | length 3918.3
  Top Layer w10: U2.31@2157.32,-4285.04 2250.04,-4285.04 v1(2280,-4315) ; v1(2435,-4315) 2655,-4315 2745,-4225 2745,-4005 2975,-3775 v1(2975,-3550)
  Bottom Layer w10: v1(2280,-4315) v1(2435,-4315) ; R19.1@2515,-1350 3120,-1955 3120,-2796.86 2975,-2941.86 v1(2975,-3550)
PC3: J7.17 U2.57 | length 2233.2
  Top Layer w10: U2.57@1970.12,-3841.92 1970.12,-3559.88 2010,-3520 2709.56,-3520 2950,-3279.56 2950,-3158.28 3003.28,-3105 v1(3250,-3105)
  Bottom Layer w10: v1(3250,-3105) 3660.51,-3105 J7.17@3661.42,-3105.91
PC4: J7.16 U2.56 | length 2348.1
  Top Layer w10: U2.56@1989.81,-3841.93 1989.81,-3570.19 2020,-3540 2717.84,-3540 2970,-3287.84 2970,-3166.57 3006.57,-3130 v1(3185,-3130)
  Bottom Layer w10: v1(3185,-3130) 3260,-3055 3712.32,-3055 J7.16@3761.42,-3005.91
PC5: J7.18 U2.55 | length 2303.6
  Top Layer w10: U2.55@2009.49,-3841.92 2009.49,-3580.51 2030,-3560 2726.13,-3560 2990,-3296.13 2990,-3175 3010,-3155 v1(3200,-3155) ; J7.18@3761.42,-3128.58 J7.18@3761.42,-3105.91
  Bottom Layer w10: v1(3200,-3155) 3712.32,-3155 J7.18@3761.42,-3105.91
PC6: R63.1 U2.32 | length 4573.8
  Top Layer w10: v1(460,-2495) 425,-2495 345,-2575 345,-3653.28 525,-3833.28 v1(525,-4175) ; v1(525,-4300) 653.52,-4300 1010,-4656.48 1010,-4706.63 1168.37,-4865 1973.14,-4865 2315,-4523.14 2315,-4305.35 2275,-4265.35 U2.32@2157.33,-4265.35
  Bottom Layer w10: R63.1@420,-2495.91 v1@459.09,-2495.91 ; v1(525,-4300) v1(525,-4175)
PC7: R64.2 U2.46 | length 4144.7
  Top Layer w10: U2.46@2157.33,-3989.77 2675.38,-3989.77 2900,-3765.15 v1(2900,-3675) ; v1(2200,-2710) 2230,-2740 v1(2435,-2740)
  Bottom Layer w10: R64.2@420,-2555.91 470.91,-2555.91 590,-2675 1415,-2675 1450,-2710 v1(2200,-2710) ; v1(2435,-2740) 2770,-3075 2770,-3545 v1(2900,-3675)
PC8: R65.1 U2.54 | length 2656
  Top Layer w10: v1(460,-2615.91) 600,-2755.91 v1(600,-3100) ; U2.54@2029.18,-3841.93 2029.18,-3635.82 2035,-3630 v1(2035,-3590)
  Bottom Layer w10: R65.1@420,-2615.91 v1(460,-2615.91) ; v1(600,-3100) 600,-3410 715,-3525 1970,-3525 v1(2035,-3590)
RXD2_232: JP5.3 U8.10 | length 589.2
  Top Layer w12: v1(1870,-990) 1880.31,-1000.32 U8.10@1880.31,-1070
  Bottom Layer w12: JP5.3@1375,-1000 1392,-983 1863,-983 v1(1870,-990)
RXD2_485: JP5.1 R41.2 U9.1 | length 506.9
  Top Layer w12: R41.2@1110,-520 1110,-735 1175,-800 U9.1@1175,-850 JP5.1@1175,-1000
TMP0: C12.2 R6.1 S2.2 U2.39 | length 2428.9
  Top Layer w10: 1915,-4981.12 1915,-4979.71 2410,-4484.71 2410,-4287.22 2250.34,-4127.56 U2.39@2157.33,-4127.56
  Top Layer w12: C12.2@1205,-5174.29 1205,-5145 ; R6.1@1205,-5114.29 1205,-5145 ; 1310.71,-5145 1205,-5145 ; S2.2@1311.42,-5331.3 1311.42,-5145 ; S2.2@1311.42,-4957.28 1311.42,-5145 ; 1915,-4981.12 1751.12,-5145 1311.42,-5145
TST: C10.2 JP2.1 R7.1 U2.38 | length 1020
  Top Layer w10: U2.38@2157.33,-4147.24 2241.74,-4147.24 2385,-4290.5 v1(2385,-4450)
  Bottom Layer w10: v1(2385,-4450) 2495,-4450 2520,-4425 2720,-4425 JP2.1@2770,-4475
  Bottom Layer w12: JP2.1@2770,-4475 2770,-4530 C10.2@2800,-4560 R7.1@2800,-4620
VCC: C2.1 C4.2 D1.K J2.1 R2.2 TP1.1 U1.3 | length 985.2
  Top Layer w15: 3550,-600 R2.2@3640,-600
  Top Layer w30: D1.K@3275,-500 3370,-500 ; J2.1@3350,-150 3370,-170 3370,-500 ; U1.3@3550,-666.89 3550,-600 C4.2@3550,-510 ; C4.2@3550,-500 C2.1@3460,-500 3370,-500 ; C4.2@3560,-500 TP1.1@3665,-500
VDD_EXT: J7.20 JP7.2 | length 1633.4
  Top Layer w30: J7.20@3761.42,-3205.91 3829.09,-3205.91 3855,-3180 v2(3855,-2165)
  Bottom Layer w30: JP7.2@3430,-1950 3640,-1950 v2(3855,-2165)
VDDBU: BT1.3 C9.2 C32.2 C33.2 JP2.2 R5.2 R6.2 TP10.1 U2.34 | length 7367.5
  Top Layer w10: v1(2082.01,-4217.24) 2090.75,-4225.98 U2.34@2157.33,-4225.98
  Top Layer w15: R5.2@1145,-5049.29 R6.2@1205,-5049.29 ; R6.2@1210,-5044.29 v1(1210,-5000) ; JP2.2@2775,-4370 v1(2775,-4150) ; v1(3000,-4800) 3335,-4465 v1(3335,-4150) 3510,-3975 3510,-3450 3510,-2175 3605,-2080 C9.2@3605,-1780 BT1.3@3605,-1606.02 3398.98,-1606.02 TP10.1@3350,-1655
  Bottom Layer w10: v1(2082.01,-4217.24) C33.2@2142.01,-4217.24 C32.2@2142.01,-4152.24
  Bottom Layer w15: v1(1210,-5000) 1220,-4990 2095,-4990 2235,-4850 2950,-4850 v1(3000,-4800) ; C32.2@2137.01,-4147.24 2194.25,-4090 2715,-4090 v1(2775,-4150) v1(3335,-4150)
VDDCORE: C25.2 C26.2 C27.2 C28.2 C29.2 C30.2 C31.2 C34.2 L1.1 TP8.1 TP9.1 U2.11 U2.44 U2.63 U2.86 U2.89 | length 2525.9
  Top Layer w10: TP8.1@1375,-3725 TP9.1@1475,-3725 ; U2.89@1546.69,-4166.93 v1@1621.7,-4166.93 ; U2.86@1546.69,-4107.87 1597.64,-4107.87 v1(1622.01,-4132.24) ; U2.11@1812.64,-4452.56 v1@1812.64,-4377.87 ; v1(1852.01,-3917.24) U2.63@1852.01,-3841.92 ; v1@2085.12,-4029.14 U2.44@2157.33,-4029.14
  Bottom Layer w10: TP9.1@1475,-3725 1710,-3725 C30.2@1825,-3840 ; C31.2@1562.01,-4192.24 1597.01,-4192.24 v1(1622.01,-4167.24) 1637.01,-4152.24 C25.2@1707.01,-4152.24 1742.01,-4187.24 1742.01,-4302.24 1767.01,-4327.24 1862.01,-4327.24 2017.01,-4172.24 C27.2@2017.01,-4067.24 ; C26.2@1562.01,-4132.24 v1(1622.01,-4132.24) 1639.51,-4149.74 ; C28.2@1812.01,-4432.24 v1(1812.01,-4377.24) 1812.01,-4329.74 ; v1(1852.01,-3917.24) 1825,-3890.24 C30.2@1825,-3840 ; L1.1@2000,-3840 C34.2@1895,-3840 ; C29.2@2137.01,-4027.24 2087.01,-4027.24 v1(2082.01,-4032.24) 2047.01,-4067.24 C27.2@2017.01,-4067.24 ; C30.2@1825,-3840 C34.2@1895,-3840 ; C34.2@1895,-3840 1895,-3945.24 C27.2@2017.01,-4067.24
VDDIN: C13.2 C14.2 C15.2 C16.2 C17.2 C18.2 C19.2 C36.2 JP1.1 JP3.2 JP6.2 L2.1 R8.2 R9.2 R78.2 TP3.1 U2.33 U2.49 U2.76 U2.85 U2.99 | length 6481
  Top Layer w10: U2.99@1546.69,-4363.78 v1@1640.47,-4363.78 ; U2.85@1546.69,-4088.19 1611.07,-4088.19 v1(1622.01,-4077.24) ; U2.76@1546.69,-3911.02 1650.79,-3911.02 v1(1677.01,-3937.24) ; v1(1642.01,-4362.24) 1642.01,-4357.24 1662.01,-4337.24 1662.01,-4117.24 v1(1622.01,-4077.24) ; U2.33@2157.32,-4245.67 2093.58,-4245.67 v1(2082.01,-4257.24) 2037.01,-4212.24 2037.01,-4077.24 ; U2.49@2157.32,-3930.71 2118.55,-3930.71 v1(2082.01,-3967.24) 2037.01,-4012.24 2037.01,-4077.24 ; v1(1622.01,-4077.24) 2037.01,-4077.24
  Top Layer w20: R8.2@2695,-5049.29 R9.2@2755,-5049.29 v1(2755,-5000)
  Bottom Layer w10: C36.2@1345,-4190 1345,-4140 L2.1@1410,-4075 1447.76,-4037.24 1527.01,-4037.24 C14.2@1562.01,-4072.24 1617.01,-4072.24 v1(1622.01,-4077.24) 1627.01,-4072.24 C13.2@1707.01,-4072.24 1707.01,-3967.24 v1(1677.01,-3937.24) 1652.01,-3912.24 C18.2@1562.01,-3912.24 ; C19.2@1562.01,-4362.24 v1(1642.01,-4362.24) ; v1(2082.01,-4257.24) 2122.01,-4257.24 C16.2@2142.01,-4277.24 C15.2@2142.01,-4342.24 ; v1(2082.01,-3967.24) 2112.01,-3937.24 C17.2@2137.01,-3937.24
  Bottom Layer w20: C15.2@2137.01,-4347.24 2137.01,-4382.01 2185,-4430 2310,-4430 2365,-4375 JP3.2@2670,-4375 2755,-4290 3420,-4290 ; v1(2755,-5000) 2810,-4945 3050,-4945 3420,-4575 3420,-4290 ; R78.2@2915,-4050 3420,-4050 ; TP3.1@3325,-3675 TP3.1@3327.5,-3677.5 ; JP6.2@3330,-3550 TP3.1@3330,-3675 3420,-3765 3420,-4050 ; 3420,-4290 3420,-4050
VDDLCD: C20.2 C21.2 TP7.1 U2.92 | length 598.9
  Top Layer w10: TP7.1@1185,-4195 1215.98,-4225.98 U2.92@1546.69,-4225.98 v1@1620.75,-4225.98
  Bottom Layer w10: C21.2@1562.01,-4252.24 1597.01,-4252.24 v1(1622.01,-4227.24) C20.2@1702.01,-4227.24
VDDPLL: C35.2 L1.2 R11.2 TP11.1 U2.53 | length 604.3
  Top Layer w10: v1(2032.01,-3917.24) 2048.86,-3900.39 2048.86,-3878.45 ; 2048.86,-3880.39 U2.53@2048.86,-3841.93
  Bottom Layer w10: L1.2@2010,-3715 2075,-3650 TP11.1@2150,-3650 ; L1.2@2015,-3715 R11.2@2115,-3815 ; v1(2032.01,-3917.24) 2057.76,-3917.24 2115,-3860 R11.2@2115,-3815 ; C35.2@2175,-3815 R11.2@2115,-3815
VDDREF: C37.2 L2.2 R12.2 TP12.1 U2.77 | length 963.8
  Top Layer w10: U2.77@1546.69,-3930.71 1615.47,-3930.71 v1(1642.01,-3957.24)
  Bottom Layer w10: TP12.1@1275,-3725 1260,-3740 1260,-3975 1275,-3990 L2.2@1275,-4075 1285,-4075 L2.2@1290,-4070 ; L2.2@1285,-4070 L2.2@1290,-4070 ; v1(1642.01,-3957.24) 1457.24,-3957.24 1410,-3910 C37.2@1390,-3910 R12.2@1390,-3970 L2.2@1290,-4070
VUSB: C41.2 C42.2 C52.2 L3.2 U3.20 U7.1 U7.3 | length 778.1
  Top Layer w12: U7.1@570.28,-647.4 527.4,-647.4 520,-640 520,-580 527.4,-572.6 U7.3@570.28,-572.6
  Top Layer w30: L3.2@420,-480 v1(485,-480) v1(510,-480) C52.2@570,-480 U7.3@570,-572.32
  Bottom Layer w12: U3.20@640.28,-695 C42.2@640.28,-560.28
  Bottom Layer w20: C42.2@640,-560 C41.2@640,-480
  Bottom Layer w30: v1(485,-480) v1@509.37,-480 ; v1(510,-480) C41.2@640,-480
pads on no net: BT1.2 J3.4 J5.1 J5.4 J5.6 J5.9 J6.17 J6.19 J8.3 J8.4 J8.5 J8.6 LCD1.7 U2.37 U3.2 U3.3 U3.6 U3.9 U3.10 U3.11 U3.13 U3.14 U3.27 U3.28 U5.1 U5.4 U6.1 U6.4 U7.4 U8.12 U11.1 U11.2 U11.3 U11.7
copper on no net:
  other v1: 970,-4310

## Polygon pours and split planes (outlines as drawn)
GND_ISO on Top Layer "Top Layer-No Net" (solid, remove dead copper, pour order 8): 0,-400 800,-400 950,-550 950,-1250 850,-1350 0,-1350
GND on Top Layer "Top Layer-No Net" (solid, remove dead copper, pour order 6): 950,0 950,-300 1100,-450 1100,-1400 800,-1700 0,-1700 0,-5550 3950,-5550 3950,0
GND_ISO on Bottom Layer "Top Layer-No Net" (solid, pour order 7): 0,-400 800,-400 950,-550 950,-1250 850,-1350 0,-1350
GND on Bottom Layer "Top Layer-No Net" (solid, remove dead copper, pour order 5): 950,0 950,-300 1100,-450 1100,-1400 800,-1700 0,-1700 0,-5550 3950,-5550 3950,0

## Keep-outs
Keep-Out Layer:
  circle w6: c200,-200 r59.06
  circle w6: c200,-5311.81 r59.06
  circle w6: c3737.01,-200 r59.06
  circle w6: c3737.01,-5311.81 r59.06
  lines w10: 0,-5433.07 ccw(c78.74,-5433.07) 78.74,-5511.81 3858.27,-5511.81 ccw(c3858.27,-5433.07) 3937.01,-5433.07 3937.01,-78.74 ccw(c3858.27,-78.74) 3858.27,0 78.74,0 ccw(c78.74,-78.74) 0,-78.74 0,-5433.07

## Silkscreen, mask and mechanical layers (free items; w line width, h text height)
Top Overlay:
  lines w8: 450,-3250 450,-2250 ; 3400,-3250 3400,-2250
  text "VCC" at 3185,-170 h60
  text "GND" at 3510,-170 h60
  text "B" at 865,-200 h80
  text "A" at 1350,-200 h80
  text "RS232" at 1400,-1265 h80 r90
  text "RS485" at 1200,-1270 h80 r90
  text "PB11" at 315,-2325 h60
  text "GND" at 465,-2325 h60
  text "PA13" at 3265,-2325 h60
  text "GND" at 3415,-2325 h60
  text "NC" at 366.56,-2425 h60
  text "NC" at 465,-2425 h60
  text "PA16" at 3263.95,-2425 h60
  text "PA18" at 3415,-2425 h60
  text "NC" at 366.56,-2525 h60
  text "NC" at 465,-2525 h60
  text "PA19" at 3264.56,-2525 h60
  text "PA20" at 3415,-2525 h60
  text "PC6" at 343.08,-2625 h60
  text "PC7" at 465,-2625 h60
  text "PA26" at 3263.95,-2625 h60
  text "PA27" at 3415,-2625 h60
  text "PC8" at 343.36,-2725 h60
  text "PA23" at 465,-2725 h60
  text "PA28" at 3264.22,-2725 h60
  text "PA29" at 3415,-2725 h60
  text "PA24" at 312.17,-2825 h60
  text "PA25" at 465,-2825 h60
  text "PB6" at 3295.25,-2825 h60
  text "PB7" at 3415,-2825 h60
  text "PA11" at 315.06,-2925 h60
  text "PA12" at 465,-2925 h60
  text "PB8" at 3295.52,-2925 h60
  text "PB9" at 3415,-2925 h60
  text "PA22" at 313.06,-3025 h60
  text "PA7" at 465,-3025 h60
  text "PC2" at 3295.19,-3025 h60
  text "PC4" at 3415,-3025 h60
  text "PA6" at 343.8,-3125 h60
  text "PA8" at 465,-3125 h60
  text "PC3" at 3295.64,-3125 h60
  text "PC5" at 3415,-3125 h60
  text "EXT" at 3415,-3195 h60
  text "3V3" at 465,-3205 h60
  text "GND" at 323.66,-3225 h60
  text "PB10" at 3264.5,-3225 h60
  text "VDD" at 3415,-3240 h60
  text "SYS" at 465,-3250 h60
  text "JTAG" at 400,-4230.18 h80 r90
  text "NRST" at 2937.98,-4405 h80
  text "TST" at 2800,-4662.79 h80 r90
  text "ERASE" at 2705,-4745.52 h80 r90
  text "JTAGSEL" at 2600,-4825 h80 r90
  text "Energy Metering Demo Board" at 3600,-5000 h100 r90
  text "Control Board - SAM4C" at 3700,-5000 h100 r90
  text "SMART ENERGY" at 1590,-5355 h100
  text "FWUP" at 858.83,-5430 h80
  text "TMP0" at 1313.46,-5430 h80
  text "UP" at 2459.89,-5430 h80
  text "DOWN" at 2847.99,-5430 h80
Bottom Overlay:
  circle w25: c2800,-125 r11.18
  lines w6: 2800,-265 2800,-210 ; 2815,-125 2915,-125
  lines w10: 2861.92,-74.34 ccw(c2800,-125) 2864.51,-172.31
  text "DC 5V ~ 9V" at 2705,-140 h80
  text "+" at 2975,-155 h60
  text "-" at 2820,-320 h60

## Text inside footprints (layer, text, board x,y; h text height)
C2: Top Overlay "+" at 3480,-615 h80 r90
C3: Top Overlay "+" at 3305,-910 h80 r90
D2: Top Overlay "+" at 3020,-630 h80 r270
D4: Top Overlay "+" at 45,-1005 h80
D5: Top Overlay "+" at 45,-925 h80
D6: Top Overlay "+" at 640,-2090 h40 r270